# Altium PCB PCB2.PcbDoc
Units mil, origin at the board's own origin, x right, y up, seen from the top; angles counter-clockwise.
Board outline 3760.03 x 3750.03 mil, 2 copper layers (Top Layer, Bottom Layer); 73 components, 95 nets, 362 pads, 0 vias.
Unrouted connection lines stored in the file: 223.
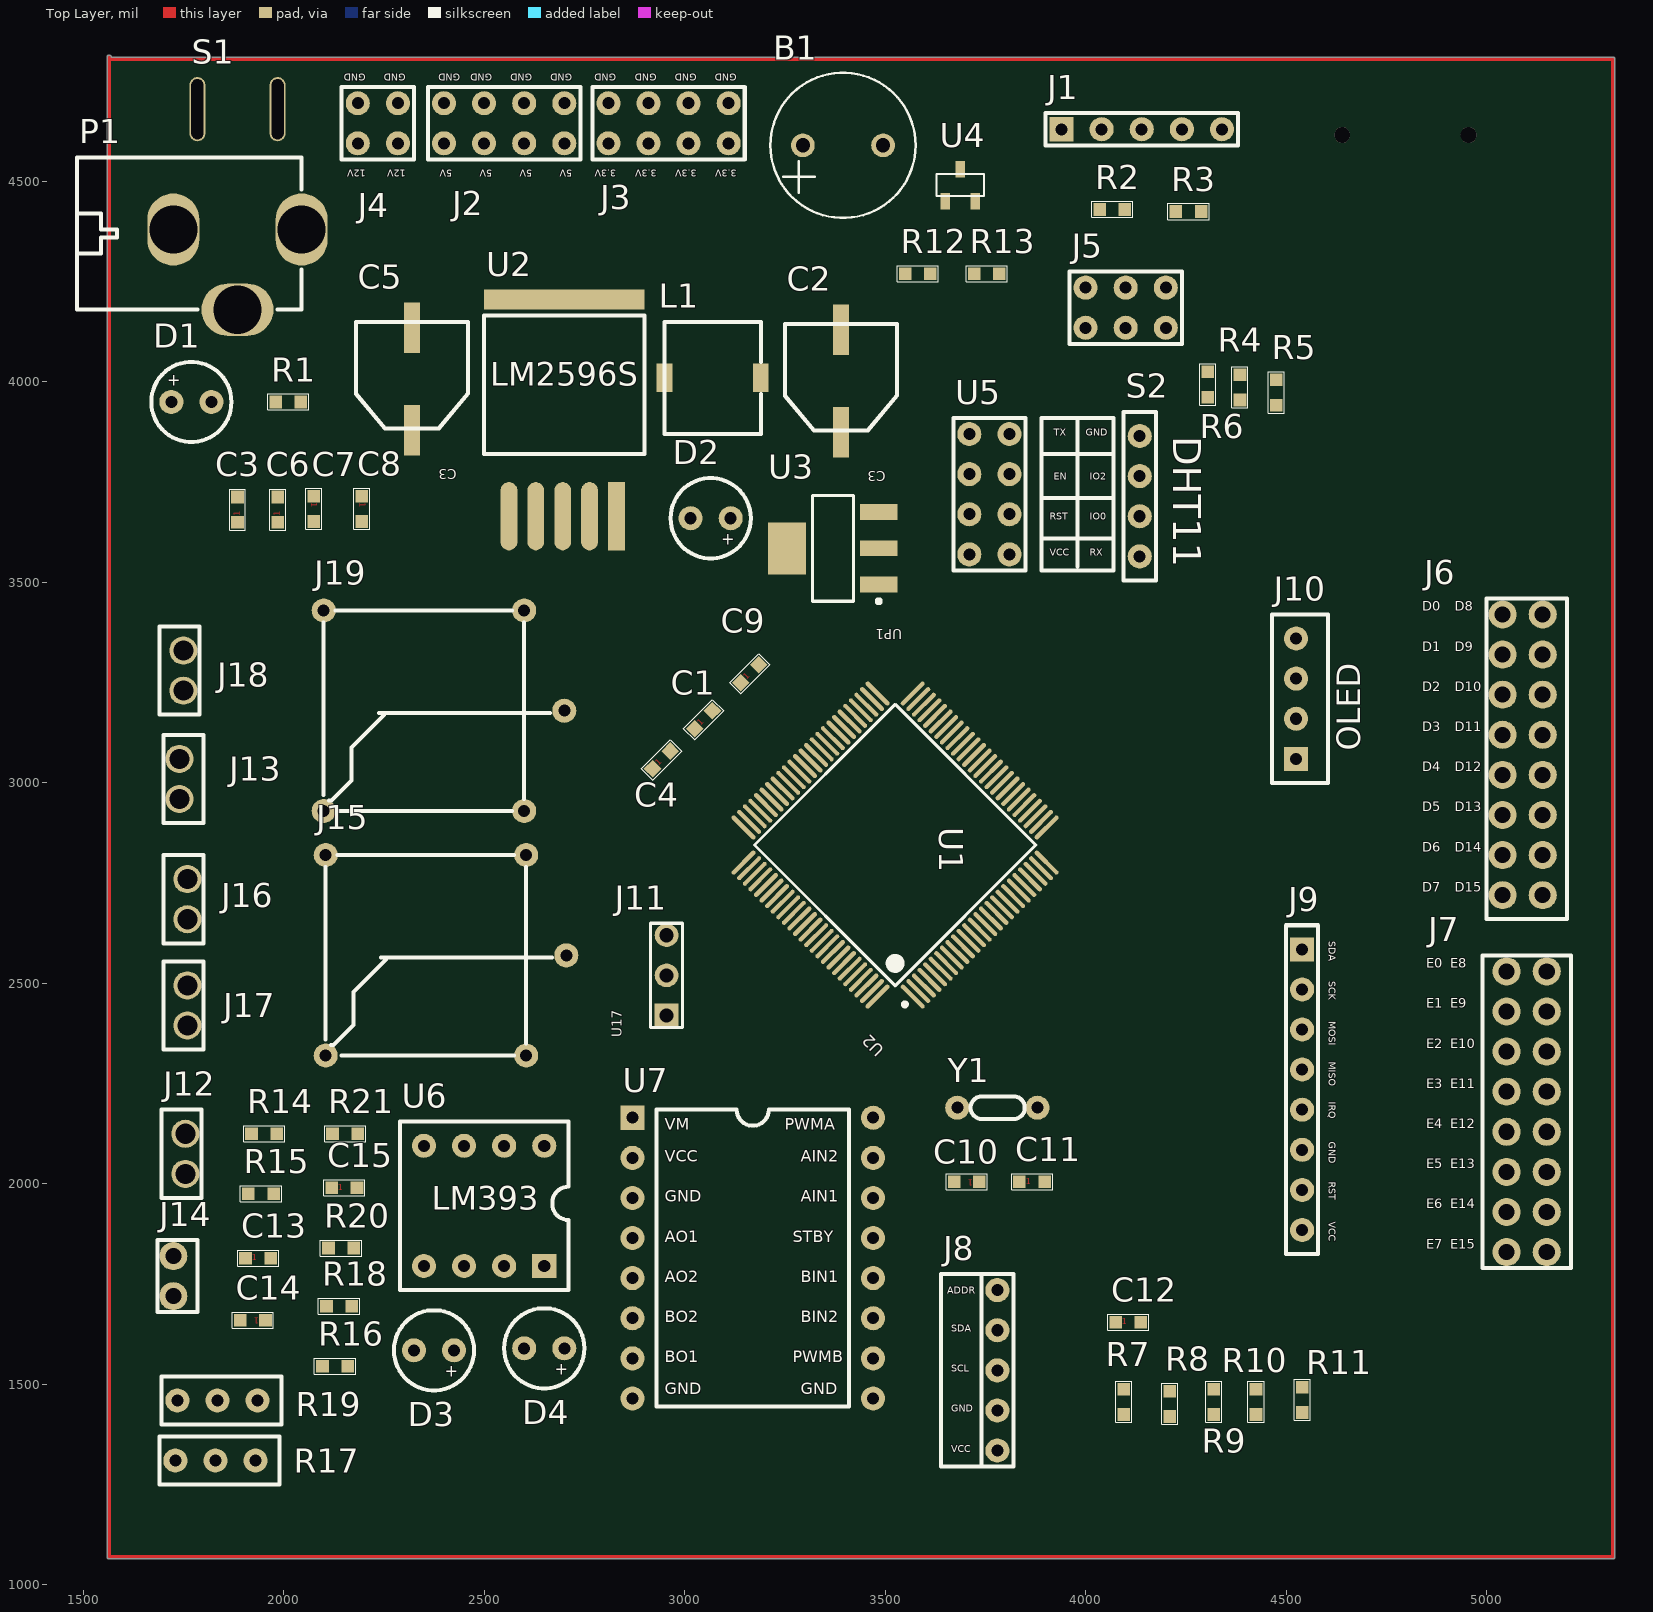
[diagram p0: Top Layer view]
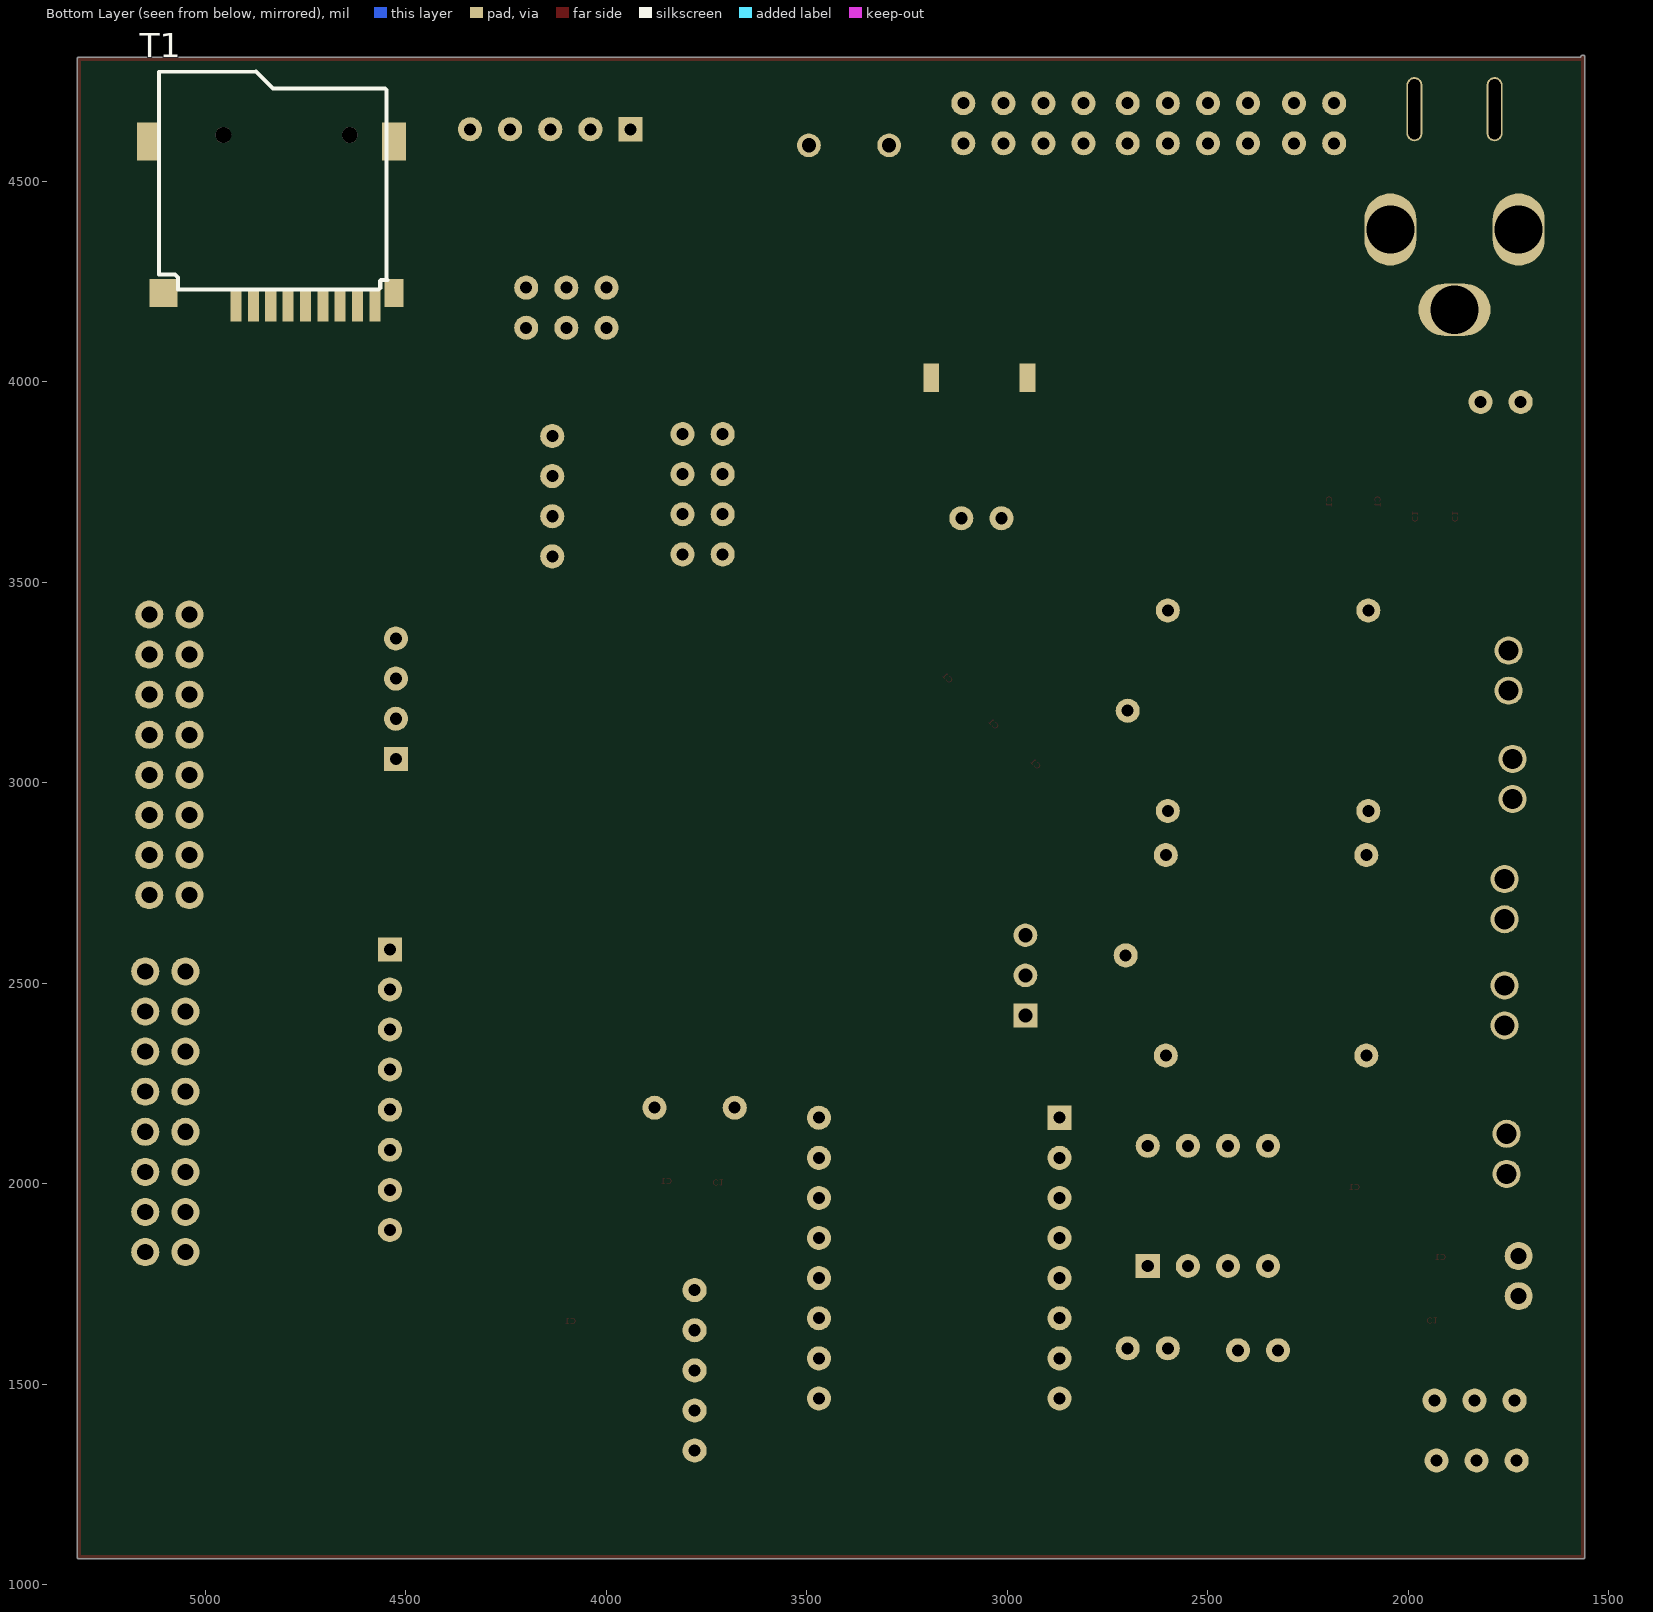
[diagram p1: Bottom Layer view, seen from below]

## Layer stack, top to bottom
Top Solder: solder mask 0.4, Solder Resist, Dk 3.5
Top Layer: signal copper 1.4
Dielectric 1: dielectric 12.6, FR-4, Dk 4.8
Bottom Layer: signal copper 1.4
Bottom Solder: solder mask 0.4, Solder Resist, Dk 3.5

## Board outline
1559.98,1070 ccw(c1565,1070) 1565,1064.98 5315,1064.98 ccw(c5315,1070) 5320.02,1070 5320.02,4805 ccw(c5315,4805) 5315,4810.02 1570.02,4810.02 ccw(c1565,4810) 1559.98,4810

## Design rules (kind name [scope] priority, off if disabled: settings)
Clearance [All] p1: gap=4
DiffPairsRouting [All] p1: maxlimit=10 minlimit=6 mostfreqgap=6 toplayer_minwidth=4 toplayer_maxwidth=10 toplayer_prefwidth=8 bottomlayer_minwidth=4 bottomlayer_maxwidth=10 bottomlayer_prefwidth=8 maxuncoupledlength=500
HoleSize [All] p1 off: absolutevalues=TRUE maxlimit=100 minlimit=1 maxpercent=80.000 minpercent=20.000
HoleToHoleClearance [All] p1 off: gap=10 allowstackedmicrovias=TRUE
LayerPairs [All] p1 off: enforce=TRUE
MinimumAnnularRing [All] p1: minimumring=4
MinimumSolderMaskSliver [All] p1 off: minsoldermaskwidth=4
NetAntennae [All] p1 off: netantennaetolerance=0
PolygonConnect [All] p1: connectstyle=Relief reliefconductorwidth=10 reliefentries=4 polygonreliefangle="90 Angle" airgapwidth=10
RoutingCorners [All] p1: cornerstyle=45-Degree minsetback=50 maxsetback=60
RoutingVias [All] p1: holewidth=8 width=10 viastyle="Through Hole" minholewidth=6 minwidth=8 maxholewidth=10 maxwidth=12
SilkToBoardRegionClearance [All] p1 off:
SilkToSilkClearance [All] p1 off: silktosilkclearance=10
SilkToSolderMaskClearance [IsPad] p1 off: minsilkscreentomaskgap=10 clearancetoexposedcopper=TRUE
SolderMaskExpansion [All] p1: expansion=4
Width [All] p1: maxlimit=8 minlimit=4 preferedwidth=6 minimp=50.000000 maximp=50.000000 favimp=50.000000
19 further rules are at their usual default settings.

## Classes and differential pairs
component class Sheet1: B1 C1 C2 C3 C4 C5 C6 C7 C8 C9 C10 C11 C12 D1 D2 J1 J2 J3 J4 J5 J6 J7 L1 P1 R1 R2 R3 R4 R5 R6 R7 R8 R9 R10 R11 R12 R13 S1 S2 T1 U1 U2 U3 U4 Y1
component class Sheet2: C13 C14 C15 D3 D4 J8 J9 J10 J11 J12 J13 J14 J15 J16 J17 J18 J19 R14 R15 R16 R17 R18 R19 R20 R21 U5 U6 U7

## Components (designator, comment, footprint, x,y, rotation, side; value= is the part's Value field where it differs from the comment)
B1 "BEEP" BEEP-9.5X5.5 3395,4590 r0 top
C1 "0.1U" CAP_0603_FIRE 3025,3135 r45 top
C2 "220UF35V" CAP+_47UF_FIRE 3390,3985 r180 top
C3 "0.1UF" CAP_0603_FIRE 1885,3650 r90 top
C4 "0.1U" CAP_0603_FIRE 2920,3035 r45 top
C5 "220UF35V" CAP+_47UF_FIRE 2320,3990 r180 top
C6 "0.1UF" CAP_0603_FIRE 1985,3650 r90 top
C7 "22UF" CAP_0603_FIRE 2075,3715 r270 top
C8 "0.1UF" CAP_0603_FIRE 2195,3715 r270 top
C9 "0.1U" CAP_0603_FIRE 3140,3250 r45 top
C10 "20P" CAP_0603_FIRE 3735,2005 r180 top
C11 "20P" CAP_0603_FIRE 3835,2005 r0 top
C12 "0.1UF" CAP_0603_FIRE 4075,1655 r0 top
C13 "104" CAP_0603_FIRE 1905,1815 r0 top
C14 "104" CAP_0603_FIRE 1955,1660 r180 top
C15 "104" CAP_0603_FIRE 2120,1990 r0 top
D1 "LED" LED_Z 1720,3950 r0 top
D2 "ES2D" LED_Z 3115,3660 r180 top
D3 "LED" LED_Z 2425,1585 r180 top
D4 "LED" LED_Z 2700,1590 r180 top
J1 "SWD" SWD 3940,4630 r90 top
J2 "5V" 5V 2400,4595 r90 top
J3 "3.3V" 3.3V 2810,4595 r90 top
J4 "12V" 12V 2185,4595 r90 top
J5 "BOOT" BOOT 4200,4235 r270 top
J6 "PD" PD 5040,3420 r0 top
J7 "PE" PE 5050,2530 r0 top
J8 "GY-302" GY 3780,1335 r180 top
J9 "RFID" RFID 4540,2585 r270 top
J10 "OLED" OLED 4525,3060 r90 top
J11 "HC-SR501" HDR1X3 2955,2420 r90 top
J12 "K1" port_2 1755,2125 r270 top
J13 "电磁阀" port_2 1740,2960 r90 top
J14 "Port" port 1725,1720 r90 top
J15 "relay" relay 2105,2320 r90 top
J16 "电机" port_2 1760,2760 r270 top
J17 "电机" port_2 1760,2495 r270 top
J18 "电磁阀" port_2 1750,3330 r270 top
J19 "relay" relay 2100,2930 r90 top
L1 "L" L 3190,4010 r270 top
P1 "Power" POWER 1885,4180 r90 top
R1 "1.5K" R_0603 1980,3950 r0 top
R2 "10K" R_0603 4035,4430 r0 top
R3 "10K" R_0603 4225,4425 r0 top
R4 "10K" R_0603 4385,3955 r90 top
R5 "10K" R_0603 4475,4005 r270 top
R6 "RES" R_0603 4305,4025 r270 top
R7 "10K" R_0603 4095,1425 r90 top
R8 "10K" R_0603 4210,1420 r90 top
R9 "10K" R_0603 4320,1425 r90 top
R10 "10K" R_0603 4425,1425 r90 top
R11 "10K" R_0603 4540,1430 r90 top
R12 "1K" R_0603 3550,4270 r0 top
R13 "10K" R_0603 3785,4270 r180 top
R14 "10K" R_0603 1920,2125 r0 top
R15 "10K" R_0603 1975,1975 r180 top
R16 "1k" R_0603 2160,1545 r180 top
R17 "103" RES_R 1730,1310 r90 top
R18 "1k" R_0603 2170,1695 r180 top
R19 "103" RES_R 1735,1460 r90 top
R20 "10K" R_0603 2175,1840 r180 top
R21 "10K" R_0603 2185,2125 r180 top
S1 "" SWITCH 1785,4680 r0 top
S2 "DHT11" DHT11 4135,3865 r270 top
T1 "TF" TF_CARD 4530,4600 r0 bottom
U1 "STM32F103VET6" STM32F103VET6-LQFP 3525,2845 r135 top
U2 "LM2596" LM2596 2830,3665 r270 top
U3 "AMS1117" AMS-1117-3.3 3370,3585 r180 top
U4 "9014" SOT-23 3650,4450 r0 top
U5 "ESP8266" ESP8266 3710,3870 r0 top
U6 "LM393" LM393 2650,2095 r270 top
U7 "TB6612" TB6612 2870,2165 r0 top
Y1 "8MHZ" XTAL 3880,2190 r180 top

## Footprints (in the part's own frame and the unit in brackets; to place one, negate y for a bottom-side part, rotate by r counter-clockwise, add the part's x,y. Pads: shape width x height; smd on the part's side, far side on the other; paste and mask are expansions set on the pad)
3.3V [mil]
  round 60 hole 30: 1(0,0) 2(0,-100) 3(0,-200) 4(0,-300) 5(100,-300) 6(100,-200) 7(100,-100) 8(100,0)
  silkscreen extent -40,-340 140,40
5V [mil]
  round 60 hole 30: 1(0,0) 2(0,-100) 3(0,-200) 4(0,-300) 5(100,0) 6(100,-100) 7(100,-200) 8(100,-300)
  silkscreen extent -40,-340 140,40
12V [mil]
  round 60 hole 30: 1(0,0) 2(0,-100) 3(100,0) 4(100,-100)
  silkscreen extent -40,-140 140,40
AMS-1117-3.3 [mm]
  rect 2.4x1 smd: 1(-2.9,2.3) 2(-2.9,0) 3(-2.9,-2.3)
  rect 2.4x3.3 smd: 4(2.9,0)
  silkscreen extent -3.03,-3.35 1.3,3.47
BEEP-9.5X5.5 [mm]
  round 1.5 hole 0.9: 1(-2.54,0) 2(2.54,0)
  silkscreen extent -4.6,-4.6 4.6,4.6
BOOT [mil]
  round 60 hole 30: 1(0,0) 2(0,-100) 3(0,-200) 4(100,-200) 5(100,-100) 6(100,0)
  silkscreen extent -40,-240 140,40
CAP+_47UF_FIRE [mm]
  rect 1x3.2 smd: 1(0,2.8) 2(0,-3.683)
  silkscreen extent -3.56,-4.06 3.56,2.7
CAP_0603_FIRE [mm]
  rect 0.8x0.8 smd: 1(0,0) 2(1.6,0)
  silkscreen extent -0.5,-0.5 2.1,0.5
DHT11 [mil]
  round 60 hole 30: 1(0,0) 2(100,0) 3(200,0) 4(300,0)
  silkscreen extent -60,-40 360,40
ESP8266 [mil]
  round 60 hole 30: 1(0,-300) 2(0,-200) 3(0,-100) 4(0,0) 5(100,-300) 6(100,-200) 7(100,-100) 8(100,0)
  silkscreen extent -40,-340 360,40
GY [mil]
  round 60 hole 30: 1(0,0) 2(0,-100) 3(0,-200) 4(0,-300) 5(0,-400)
  silkscreen extent -40,-440 140,40
HDR1X3 [mm]
  rect 1.5x1.5 hole 0.9: 1(0,0)
  round 1.5 hole 0.9: 2(2.54,0) 3(5.08,0)
  silkscreen extent -0.76,-1.02 5.84,1.02
L [mm]
  rect 1.8x1 all layers, no hole: 1(0,0) 2(0,-6.096)
  silkscreen extent -3.56,-6.1 3.56,0
LED_Z [mil]
  round 60 hole 30: 1(0,0) 2(100,0)
  silkscreen extent -50,-100 150,100
LM393 [mil]
  round 60 hole 30: 1(0,0) 2(0,-100) 3(0,-200) 4(0,-300) 5(300,-300) 6(300,-200) 7(300,-100)
  rect 60x60 hole 30: 8(300,0)
  silkscreen extent -60,-360 360,60
LM2596 [mil]
  rect 170x42 smd: 1(0,0)
  oval 170x42 smd: 2(0,-67) 3(0,-134) 4(0,-201) 5(0,-268)
  rect 50x400 smd: 6(-540,-130)
  silkscreen extent -500,-330 -155,70
OLED [mil]
  rect 60x60 hole 30: 1(0,0)
  round 60 hole 30: 2(100,0) 3(200,0) 4(300,0)
  silkscreen extent -60,-80 360,60
PD [mil]
  round 70 hole 40: 1(0,0) 2(0,-100) 3(0,-200) 4(0,-300) 5(0,-400) 6(0,-500) 7(0,-600) 8(0,-700) 9(100,0) 10(100,-100) 11(100,-200) 12(100,-300) 13(100,-400) 14(100,-500) 15(100,-600) 16(100,-700)
  silkscreen extent -40,-760 160,40
PE [mil]
  round 70 hole 40: 1(0,0) 2(0,-100) 3(0,-200) 4(0,-300) 5(0,-400) 6(0,-500) 7(0,-600) 8(0,-700) 9(100,0) 10(100,-100) 11(100,-200) 12(100,-300) 13(100,-400) 14(100,-500) 15(100,-600) 16(100,-700)
  silkscreen extent -60,-740 160,40
port [mil]
  round 70 hole 40: 1(0,0) 2(100,0)
  silkscreen extent -40,-60 140,40
port_2 [mil]
  round 70 hole 50: 1(0,0) 2(100,0)
  silkscreen extent -60,-60 160,40
POWER [mil]
  oval 180x130 hole 120: 1(200,160) 3(200,-160)
  oval 130x180 hole 120: 2(0,0)
  silkscreen extent 0,-160 380,400
R_0603 [mm]
  rect 0.8x0.8 smd: 1(0,0) 2(1.6,0)
  silkscreen extent -0.51,-0.51 2.11,0.51
relay [mil]
  round 60 hole 30: 1(0,0) 2(0,-500) 3(250,-600) 4(500,-500) 5(500,0)
  silkscreen extent 0,-564 500,0
RES_R [mil]
  round 60 hole 30: 1(0,0) 2(0,-200) 3(0,-100)
  silkscreen extent -60,-260 60,40
RFID [mil]
  rect 60x60 hole 30: 1(0,0)
  round 60 hole 30: 2(100,0) 3(200,0) 4(300,0) 5(400,0) 6(500,0) 7(600,0) 8(700,0)
  silkscreen extent -60,-40 760,40
SOT-23 [mm]
  rect 0.6x1.05 smd: 1(0,0) 2(1.9,0) 3(0.965,2.032)
  silkscreen extent -0.55,0.35 2.45,1.75
STM32F103VET6-LQFP [mil]
  oval 80x11 smd: 1(-298.23,236.22) 2(-298.23,216.54) 3(-298.23,196.85) 4(-298.23,177.17) 5(-298.23,157.48) 6(-298.23,137.8) 7(-298.23,118.11) 8(-298.23,98.43) 9(-298.23,78.74) 10(-298.23,59.06) 11(-298.23,39.37) 12(-298.23,19.69) 13(-298.23,0) 14(-298.23,-19.69) 15(-298.23,-39.37) 16(-298.23,-59.06) 17(-298.23,-78.74) 18(-298.23,-98.43) 19(-298.23,-118.11) 20(-298.23,-137.8) 21(-298.23,-157.48) 22(-298.23,-177.17) 23(-298.23,-196.85) 24(-298.23,-216.54) 25(-298.23,-236.22) 51(298.23,-236.22) 52(298.23,-216.54) 53(298.23,-196.85) 54(298.23,-177.17) 55(298.23,-157.48) 56(298.23,-137.8) 57(298.23,-118.11) 58(298.23,-98.43) 59(298.23,-78.74) 60(298.23,-59.06) 61(298.23,-39.37) 62(298.23,-19.69) 63(298.23,0) 64(298.23,19.69) 65(298.23,39.37) 66(298.23,59.06) 67(298.23,78.74) 68(298.23,98.43) 69(298.23,118.11) 70(298.23,137.8) 71(298.23,157.48) 72(298.23,177.17) 73(298.23,196.85) 74(298.23,216.54) 75(298.23,236.22)
  oval 11x80 smd: 26(-236.22,-298.23) 27(-216.54,-298.23) 28(-196.85,-298.23) 29(-177.17,-298.23) 30(-157.48,-298.23) 31(-137.8,-298.23) 32(-118.11,-298.23) 33(-98.43,-298.23) 34(-78.74,-298.23) 35(-59.06,-298.23) 36(-39.37,-298.23) 37(-19.69,-298.23) 38(0,-298.23) 39(19.69,-298.23) 40(39.37,-298.23) 41(59.06,-298.23) 42(78.74,-298.23) 43(98.43,-298.23) 44(118.11,-298.23) 45(137.8,-298.23) 46(157.48,-298.23) 47(177.17,-298.23) 48(196.85,-298.23) 49(216.54,-298.23) 50(236.22,-298.23) 76(236.22,298.23) 77(216.54,298.23) 78(196.85,298.23) 79(177.17,298.23) 80(157.48,298.23) 81(137.8,298.23) 82(118.11,298.23) 83(98.43,298.23) 84(78.74,298.23) 85(59.06,298.23) 86(39.37,298.23) 87(19.69,298.23) 88(0,298.23) 89(-19.69,298.23) 90(-39.37,298.23) 91(-59.06,298.23) 92(-78.74,298.23) 93(-98.43,298.23) 94(-118.11,298.23) 95(-137.8,298.23) 96(-157.48,298.23) 97(-177.17,298.23) 98(-196.85,298.23) 99(-216.54,298.23) 100(-236.22,298.23)
  silkscreen extent -303,-248 248,269
SWD [mil]
  rect 60x60 hole 30: 1(0,0)
  round 60 hole 30: 2(0,-100) 3(0,-200) 4(0,-300) 5(0,-400)
  silkscreen extent -40,-440 40,40
SWITCH [mil]
  oval 40x160 hole 30 slot 150 at 90 deg: 1(0,0) 2(200,0)
TB6612 [mil]
  rect 60x60 hole 30: 1(0,0)
  round 60 hole 30: 2(0,-100) 3(0,-200) 4(0,-300) 5(0,-400) 6(0,-500) 7(0,-600) 8(0,-700) 9(600,0) 10(600,-100) 11(600,-200) 12(600,-300) 13(600,-400) 14(600,-500) 15(600,-600) 16(600,-700)
  silkscreen extent 60,-720 540,20
TF_CARD [mm]
  rect 0.7x2.1 smd: 1(10,10.35) 2(8.9,10.35) 3(7.8,10.35) 4(6.7,10.35) 5(5.6,10.35) 6(4.5,10.35) 7(3.4,10.35) 8(2.3,10.35) 9(1.2,10.35)
  rect 1.2x1.778 smd: 10(0,9.6)
  rect 1.524x2.413 smd: 11(0,0) 12(15.5,0)
  rrect0% 1.778x1.778 smd: 13(14.6,9.6)
  round 1 hole 1: 14(10.8,-0.4) 15(2.8,-0.4)
  silkscreen extent 0.41,-4.42 14.88,9.4
XTAL [mil]
  round 60 hole 30: 1(0,0) 2(200,0)
  silkscreen extent 32,-28 166,28

## Part data
C1 C3 C4 C6 C7 C8 C9 C10 C11 C12 C13 C14 C15: library part Capacitance
C2 C5: library part Capactiance+
D2: library part LED
J12 J13 J16 J17 J18: library part port_2
R1 R2 R3 R4 R5 R7 R8 R9 R10 R11 R12 R13 R14 R15 R16 R18 R20 R21: library part RES
R17 R19: library part RES_R
S1: library part Switch
Y1: library part XTAL

## Nets (pads, with @x,y where several pads share a name; then routed paths per layer and width w, separated by ;. In a path a pad name is that pad's centre, name@x,y a point inside that pad or via, vN(x,y) a via of type N, cw(c..) or ccw(c..) an arc to the next point about the centre after c; other vN are vias at no path point)
3.3V: B1.1 C1.1 C4.1 C7.2 C8.2 C9.1 C12.2 C13.1 D1.1 D3.1 D4.1 J1.5 J3.1 J3.2 J3.3 J3.4 J5.1 J5.6 J8.1 J9.8 J10.2 J11.3 R3.2 R6.1 R7.2 R8.2 R9.2 R10.2 R11.2 R14.2 R15.1 R17.2 R19.2 R20.1 R21.1 T1.4 U1.6 U1.11 U1.21 U1.22 U1.28 U1.50 U1.75 U1.100 U3.2 U5.1 U6.8 U7.1 U7.2 U7.12
5V: C5.1 C6.1 J2.1 J2.2 J2.3 J2.4 L1.2 U2.4 U3.3
12V: C2.1 C3.2 J4.1 J4.2 J15.3 J19.3 S1.2 U2.1
BOOT0: R4.1 U1.94
BOOT1: R5.2 U1.37
FIRE_IN: C15.1 J14.2 R15.2 U1.16 U6.5
FIRE_IN2: R17.3 U6.6
FIRE_OUT: R16.2 R20.2 U1.23 U6.7
GND: C1.2 C2.2 C3.1 C4.2 C5.2 C6.2 C7.1 C8.1 C9.2 C10.1 C11.1 C12.1 C13.2 C14.1 C15.2 D2.1 J1.3 J2.5 J2.6 J2.7 J2.8 J3.5 J3.6 J3.7 J3.8 J4.3 J4.4 J5.3 J5.4 J8.2 J9.6 J10.1 J11.1 J12.2 J13.2 J14.1 J15.4 J18.2 J19.4 P1.1 P1.2 R1.2 R2.2 R13.1 R19.1 S2.3 S2.4 T1.6 T1.10 T1.11 T1.12 T1.13 U1.10 U1.19 U1.20 U1.27 U1.49 U1.74 U1.99 U2.3 U2.5 U3.1 U4.2 U5.8 U6.4 U7.3 U7.8 U7.16
GY_ADDR: J8.5 U1.7
I2C_SCL: J8.3 J10.3 U1.92
I2C_SDA: J8.4 J10.4 U1.93
NetB1_2: B1.2 U4.3
NetD1_2: D1.2 R1.1
NetD2_2: D2.2 L1.1 U2.2
NetD3_2: D3.2 R16.1
NetD4_2: D4.2 R18.1
NetJ5_2: J5.2 R4.2
NetJ5_5: J5.5 R5.1
NetJ13_1: J13.1 J15.5
NetJ16_1: J16.1 U7.4
NetJ16_2: J16.2 U7.5
NetJ17_1: J17.1 U7.6
NetJ17_2: J17.2 U7.7
NetJ18_1: J18.1 J19.5
NetP1_3: P1.3 S1.1
NetR6_2: R6.2 S2.1
NetR12_2: R12.2 R13.2 U4.1
NRST: J1.1 U1.14
OSC_IN: C10.2 U1.12 Y1.2
OSC_OUT: C11.2 U1.13 Y1.1
PA8: R12.1 U1.67
PB8: U1.95 U5.3
PB9: U1.96 U5.2
PD0: J6.1 U1.81
PD1: J6.2 U1.82
PD2: J6.3 R7.1 T1.3 U1.83
PD3: J6.4 U1.84
PD4: J6.5 U1.85
PD5: J6.6 U1.86
PD6: J6.7 U1.87
PD7: J6.8 U1.88
PD8: J6.9 U1.55
PD9: J6.10 U1.56
PD10: J6.11 U1.57
PD11: J6.12 U1.58
PD12: J6.13 U1.59
PD13: J6.14 U1.60
PD14: J6.15 U1.61
PD15: J6.16 U1.62
PE0: J7.1 U1.97
PE1: J7.2 U1.98
PE2: J7.3 U1.1
PE3: J7.4 U1.2
PE4: J7.5 U1.3
PE5: J7.6 U1.4
PE6: J7.7 S2.2 U1.5
PE7: J7.8 U1.38
PE8: J7.9 U1.39
PE9: J7.10 U1.40
PE10: J7.11 U1.41
PE11: J7.12 U1.42
PE12: J7.13 U1.43
PE13: J7.14 U1.44
PE14: J7.15 U1.45
PE15: J7.16 U1.46
RELAY_1: J15.2 U1.53
RELAY_2: J19.2 U1.54
RFID_IRQ: J9.5 U1.63
RFID_RST: J9.7 U1.64
RT_OUT: J11.2 U1.91
SDIO_CK: T1.5 U1.80
SDIO_D0: R11.1 T1.7 U1.65
SDIO_D1: R10.1 T1.8 U1.66
SDIO_D2: R9.1 T1.1 U1.78
SDIO_D3: R8.1 T1.2 U1.79
SOIL_IN: C14.2 J12.1 R14.1 U1.33 U6.3
SOIL_IN2: R19.3 U6.2
SOIL_OUT: R18.2 R21.2 U1.24 U6.1
SPI_CS: J9.1 U1.29
SPI_MISO: J9.4 U1.31
SPI_MOSI: J9.3 U1.32
SPI_SCK: J9.2 U1.30
TB_AIN1: U1.47 U7.11
TB_AIN2: U1.48 U7.10
TB_BIN1: U1.51 U7.13
TB_BIN2: U1.52 U7.14
TCK: J1.2 R2.1 U1.76
TIM3_3: U1.35 U7.9
TIM3_4: U1.36 U7.15
TMS: J1.4 R3.1 U1.72
USART1_RX: U1.69
USART1_TX: U1.68
USART2_RX: U1.26 U5.4
USART2_TX: U1.25 U5.5
pads on no net: J15.1 J19.1 R17.1 T1.9 T1.14 T1.15 U1.8 U1.9 U1.15 U1.17 U1.18 U1.34 U1.70 U1.71 U1.73 U1.77 U1.89 U1.90 U2.6 U3.4 U5.6 U5.7
copper on no net: | length 14970
  Top Layer w10: 1565,4810 1565,1070 5315,1070 5315,4805 1595,4805 1570,4805

## Text inside footprints (layer, text, board x,y; h text height)
C2: Top Overlay "C3" at 3501.3,3777.39 h25 r180
C3: Top Layer "C1" at 1890.63,3650.29 h15.75 r90
C4: Top Layer "C1" at 2924.18,3031.23 h15.75 r45
C5: Top Overlay "C3" at 2431.3,3782.39 h25 r180
C6: Top Layer "C1" at 1990.63,3650.29 h15.75 r90
C7: Top Layer "C1" at 2069.37,3714.71 h15.75 r270
C8: Top Layer "C1" at 2189.37,3714.71 h15.75 r270
C9: Top Layer "C1" at 3144.18,3246.23 h15.75 r45
C10: Top Layer "C1" at 3734.71,2010.63 h15.75 r180
C11: Top Layer "C1" at 3835.29,1999.37 h15.75
C12: Top Layer "C1" at 4075.29,1649.37 h15.75
C13: Top Layer "C1" at 1905.29,1809.37 h15.75
C14: Top Layer "C1" at 1954.71,1665.63 h15.75 r180
C15: Top Layer "C1" at 2120.29,1984.37 h15.75
D1: Top Overlay "+" at 1710,3980 h50
D2: Top Overlay "+" at 3125,3630 h50 r180
D3: Top Overlay "+" at 2435,1555 h50 r180
D4: Top Overlay "+" at 2710,1560 h50 r180
J2: Top Overlay "GND" at 2440,4775 h30 r180; Top Overlay "GND" at 2520,4775 h30 r180; Top Overlay "GND" at 2620,4775 h30 r180; Top Overlay "GND" at 2720,4775 h30 r180
J3: Top Overlay "GND" at 3130,4775 h30 r180; Top Overlay "GND" at 3030,4775 h30 r180; Top Overlay "GND" at 2930,4775 h30 r180; Top Overlay "GND" at 2830,4775 h30 r180
J4: Top Overlay "GND" at 2205,4775 h30 r180; Top Overlay "GND" at 2305,4775 h30 r180
J6: Top Overlay "D0" at 4840,3420 h40; Top Overlay "D1" at 4840,3320 h40; Top Overlay "D2" at 4840,3220 h40; Top Overlay "D3" at 4840,3120 h40; Top Overlay "D4" at 4840,3020 h40; Top Overlay "D5" at 4840,2920 h40; Top Overlay "D6" at 4840,2820 h40; Top Overlay "D7" at 4840,2720 h40; Top Overlay "D8" at 4920,3420 h40; Top Overlay "D9" at 4920,3320 h40; Top Overlay "D10" at 4920,3220 h40; Top Overlay "D11" at 4920,3120 h40; Top Overlay "D12" at 4920,3020 h40; Top Overlay "D13" at 4920,2920 h40; Top Overlay "D14" at 4920,2820 h40; Top Overlay "D15" at 4920,2720 h40
J7: Top Overlay "E0" at 4850,2530 h40; Top Overlay "E1" at 4850,2430 h40; Top Overlay "E2" at 4850,2330 h40; Top Overlay "E3" at 4850,2230 h40; Top Overlay "E4" at 4850,2130 h40; Top Overlay "E5" at 4850,2030 h40; Top Overlay "E6" at 4850,1930 h40; Top Overlay "E7" at 4850,1830 h40; Top Overlay "E8" at 4910,2530 h40; Top Overlay "E9" at 4910,2430 h40; Top Overlay "E10" at 4910,2330 h40; Top Overlay "E11" at 4910,2230 h40; Top Overlay "E12" at 4910,2130 h40; Top Overlay "E13" at 4910,2030 h40; Top Overlay "E14" at 4910,1930 h40; Top Overlay "E15" at 4910,1830 h40
J8: Top Overlay "ADDR" at 3655,1720 h30; Top Overlay "SDA" at 3665,1625 h30; Top Overlay "SCL" at 3665,1525 h30; Top Overlay "VCC" at 3665,1325 h30; Top Overlay "GND" at 3665,1425 h30
J9: Top Overlay "VCC" at 4600,1905 h30 r270; Top Overlay "RST" at 4600,2005 h30 r270; Top Overlay "GND" at 4600,2105 h30 r270; Top Overlay "IRQ" at 4600,2205 h30 r270; Top Overlay "MISO" at 4600,2305 h30 r270; Top Overlay "MOSI" at 4600,2405 h30 r270; Top Overlay "SCK" at 4600,2505 h30 r270; Top Overlay "SDA" at 4600,2605 h30 r270
J11: Top Overlay "U17" at 2843.06,2366.06 h25 r90
U1: Top Overlay "U2" at 3500.77,2336.23 h30 r135
U2: Top Overlay "LM2596S" at 2515,3970 h100
U3: Top Overlay "UP1" at 3542.24,3383.3 h25 r180
U5: Top Overlay "VCC" at 3910,3560 h30; Top Overlay "RST" at 3910,3650 h30; Top Overlay "EN" at 3920,3750 h30; Top Overlay "TX" at 3920,3860 h30; Top Overlay "RX" at 4010,3560 h30; Top Overlay "IO0" at 4010,3650 h30; Top Overlay "IO2" at 4010,3750 h30; Top Overlay "GND" at 4000,3860 h30
U7: Top Overlay "GND" at 3290,1465 h50; Top Overlay "PWMB" at 3270,1545 h50; Top Overlay "BIN2" at 3290,1645 h50; Top Overlay "BIN1" at 3290,1745 h50; Top Overlay "STBY" at 3270,1845 h50; Top Overlay "AIN1" at 3290,1945 h50; Top Overlay "AIN2" at 3290,2045 h50; Top Overlay "PWMA" at 3250,2125 h50; Top Overlay "GND" at 2950,1465 h50; Top Overlay "BO1" at 2950,1545 h50; Top Overlay "BO2" at 2950,1645 h50; Top Overlay "AO2" at 2950,1745 h50; Top Overlay "AO1" at 2950,1845 h50; Top Overlay "GND" at 2950,1945 h50; Top Overlay "VM" at 2950,2125 h50; Top Overlay "VCC" at 2950,2045 h50